# EAGLE board shieldVer2 (EAGLE 8.7.1)
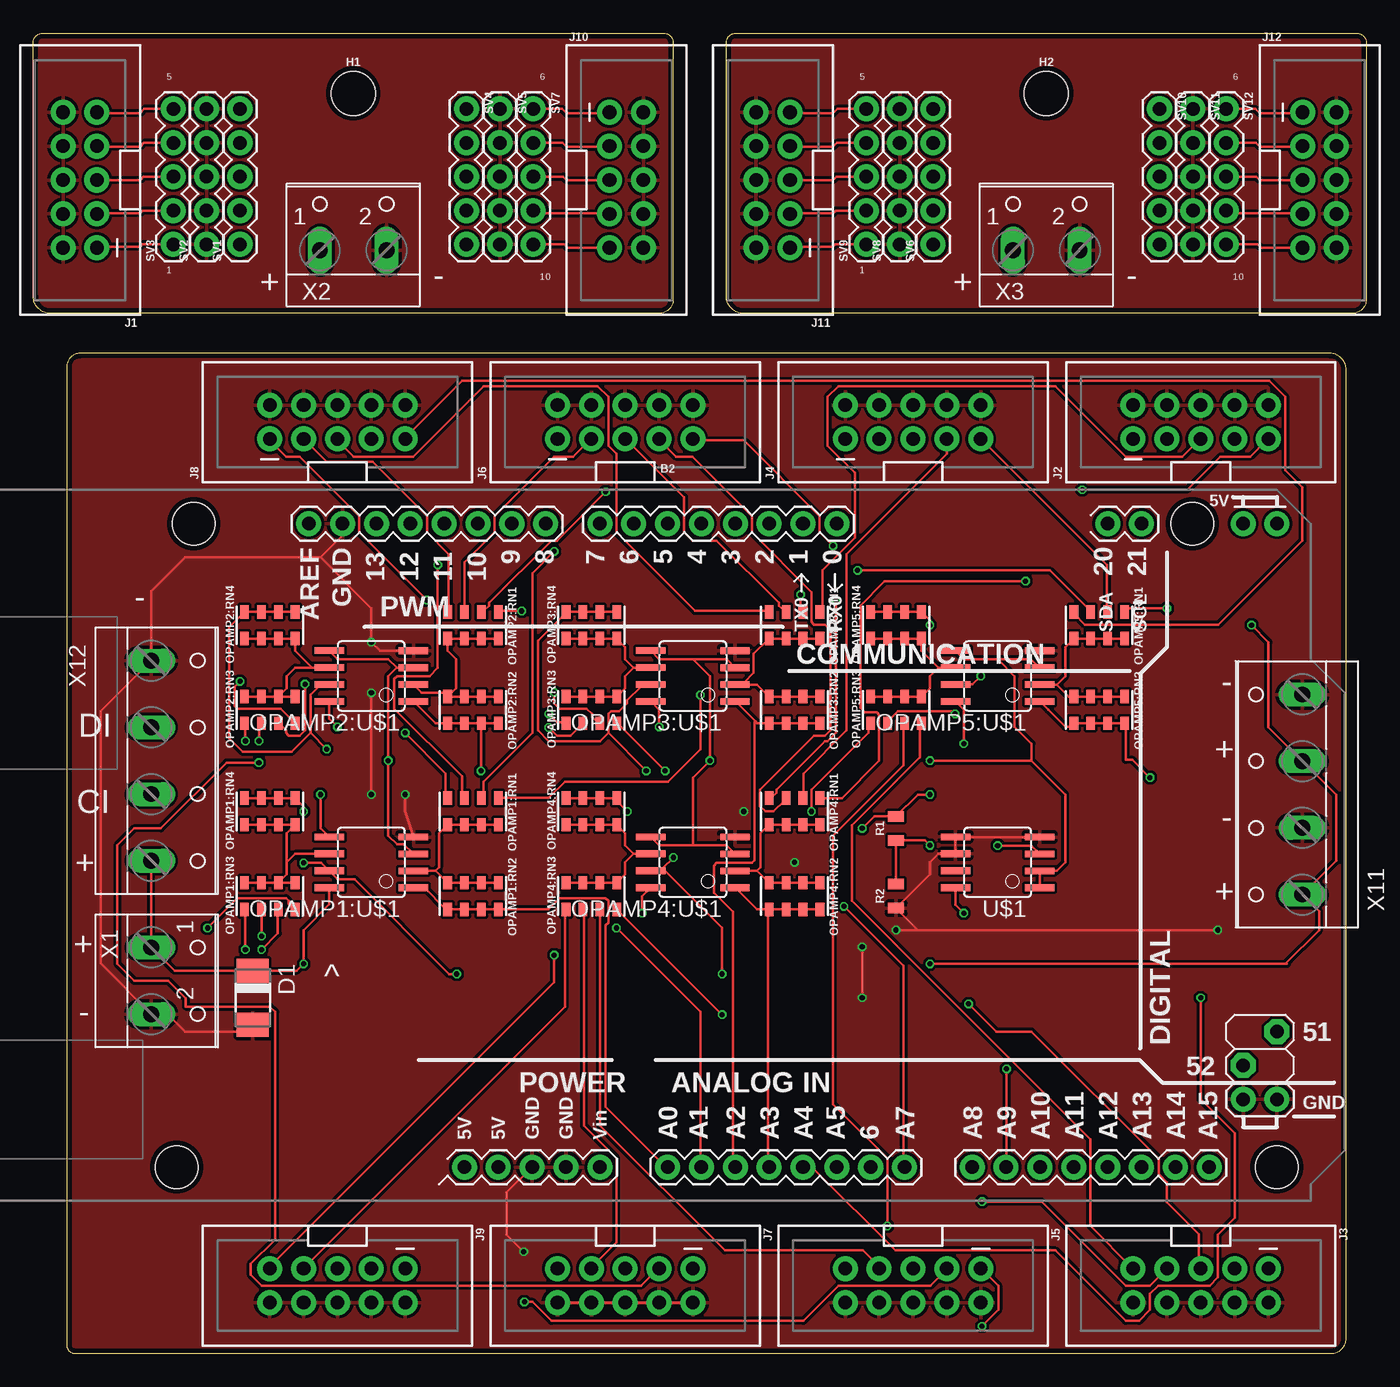
[diagram p0: board, top side]
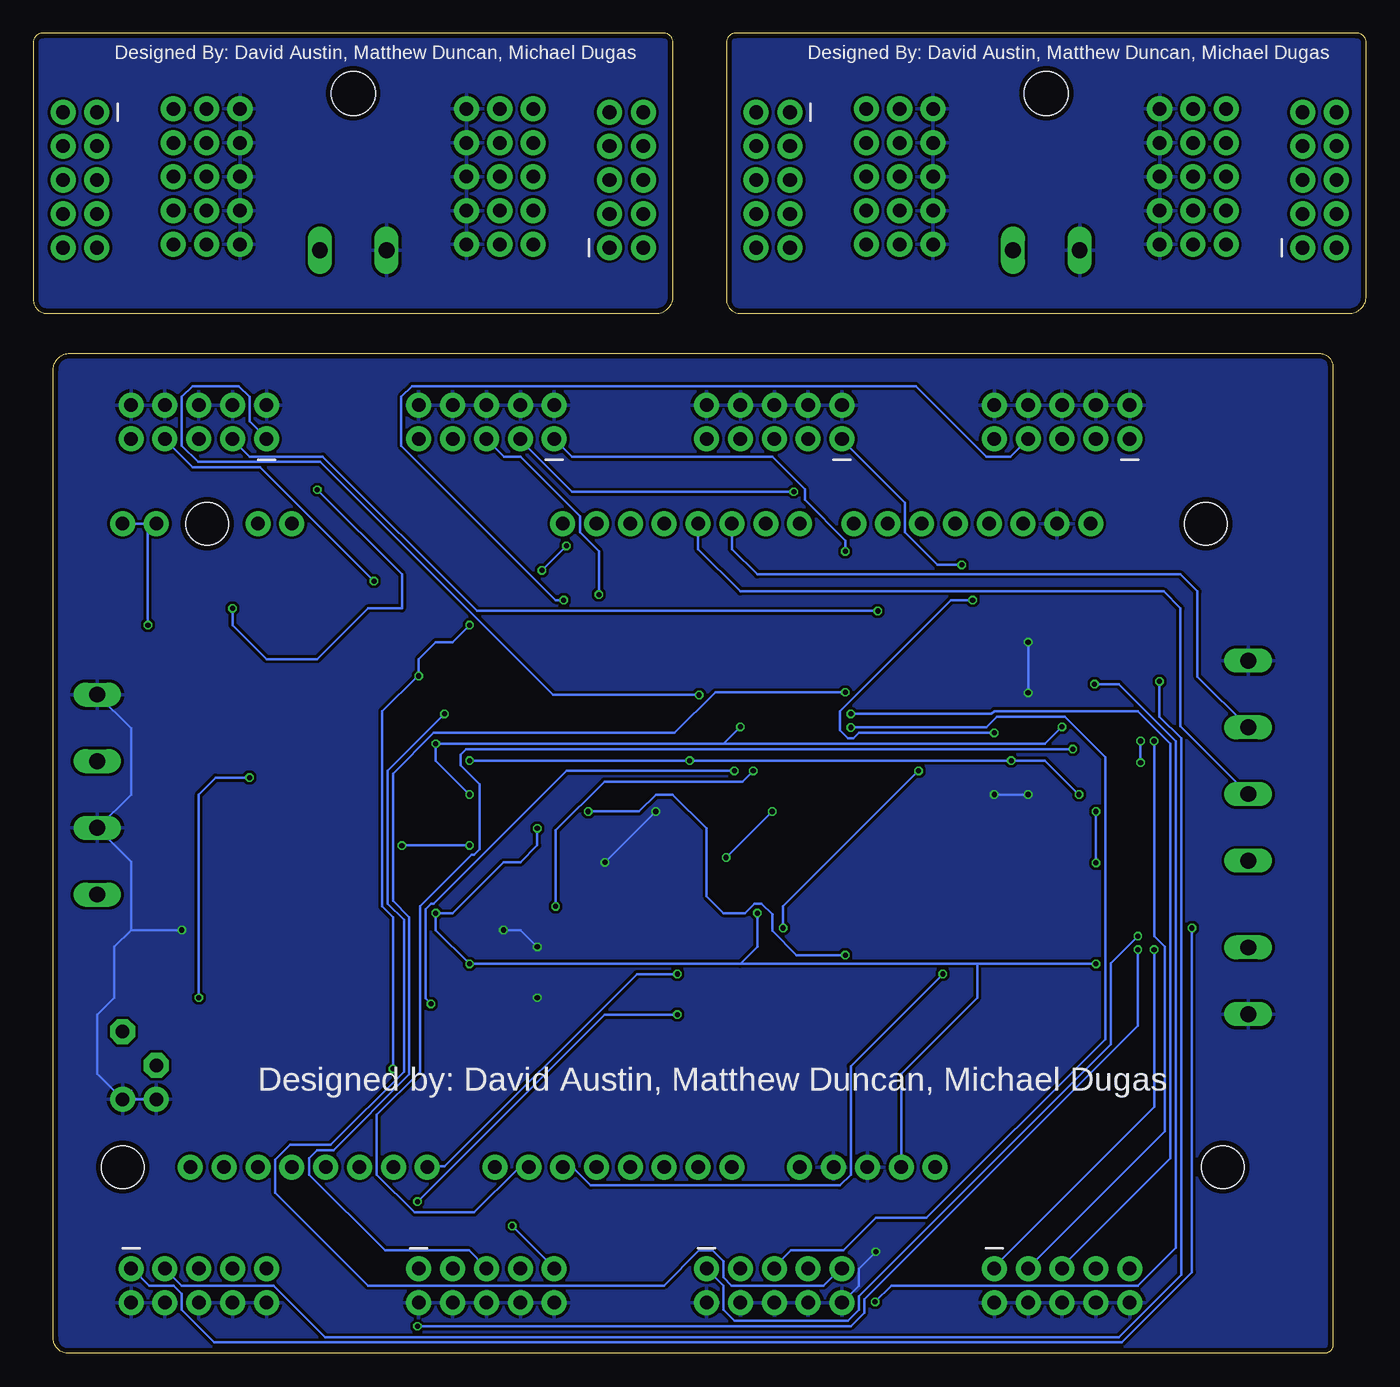
[diagram p1: board, bottom side, seen from below]

Size 100 x 99 mm. Coordinates in mm from the lower left corner, seen from the top.
Outline: 2.5,74 2.5,0.64 arc90 3.13,0 97.37,0 arc90 98.5,1.13 98.5,73.78 arc90 97.28,75 3.5,75 arc90 2.5,74
Outline: 0.68,99 47.32,99 arc-90 48,98.32 48,79.01 arc-90 46.99,78 1.27,78 arc-90 0,79.27 0,98.32 arc-90 0.68,99
Outline: 52.68,99 99.32,99 arc-90 100,98.32 100,79.01 arc-90 98.99,78 53.27,78 arc-90 52,79.27 52,98.32 arc-90 52.68,99
Copper layers (1*16): Top 0.035559375mm / dielectric 1.6mm / Bottom 0.035559375mm
Design rules "oshpark-2layer": minimum track width 6mil, minimum drill 10mil, track to track 6mil, track to pad 6mil, pad to pad 6mil, via to via 6mil, smd to smd 6mil, copper to edge 15mil, drill to drill 6mil, minimum pad ring 5mil, minimum via ring 5mil, stop-mask expansion 2.5mil, vias tented up to drill 0mil, thermal gap 10mil
Net classes: 0 default: width 0.203 mm, drill 0.381 mm, clearance 0.203 mm

## Footprints (pad centres in the part's own frame; a part is rotated, then mirrored left to right if it is on the bottom)
ARDUINO_MEGA_EDIT = drill 1.016 pad 1.88: 0 13.97,24.13; 1 11.43,24.13; 2 8.89,24.13; 3 6.35,24.13; 3.3V -13.97,-24.13; 4 3.81,24.13; 5 1.27,24.13; 5V@0 -11.43,-24.13; 5V@1 44.45,24.13; 5V@2 46.99,24.13; 6 -1.27,24.13; 7 -3.81,24.13; 8 -7.874,24.13; 9 -10.414,24.13; 10 -12.954,24.13; 11 -15.494,24.13; 12 -18.034,24.13; 13 -20.574,24.13; 20 34.29,24.13; 21 36.83,24.13; A0 1.27,-24.13; A1 3.81,-24.13; A2 6.35,-24.13; A3 8.89,-24.13; A4 11.43,-24.13; A5 13.97,-24.13; A6 16.51,-24.13; A7 19.05,-24.13; A8 24.13,-24.13; A9 26.67,-24.13; A10 29.21,-24.13; A11 31.75,-24.13; A12 34.29,-24.13; A13 36.83,-24.13; A14 39.37,-24.13; A15 41.91,-24.13; AREF -25.654,24.13; GND@0 -8.89,-24.13; GND@1 -6.35,-24.13; GND@2 44.45,-19.05; GND@3 46.99,-19.05; GND@4 -23.114,24.13; VIN -3.81,-24.13 | drill 1.016 pad 1.88 octagon: 51 46.99,-13.97; 52 44.45,-16.51 | hole 3.2: -34.29,24.13; -35.56,-24.13; 40.64,24.13; 46.99,-24.13
DO-214AC = smd 1.8 x 2.4: A 2.025,0; C -2.025,0
STAND-OFF = hole 3.302: 0,0
2X5-SHROUDED = drill 1.016 pad 1.88: 1 -1.27,5.08; 2 1.27,5.08; 3 -1.27,2.54; 4 1.27,2.54; 5 -1.27,0; 6 1.27,0; 7 -1.27,-2.54; 8 1.27,-2.54; 9 -1.27,-5.08; 10 1.27,-5.08
0805-ARV_EDIT10K = smd 0.65 x 1: 1 -1.905,-1; 2 -0.635,-1; 3 0.635,-1; 4 1.905,-1; 5 1.905,1; 6 0.635,1; 7 -0.635,1; 8 -1.905,1
SOIC8 = smd 0.5 x 2.2: 1 -1.905,-3.154; 2 -0.645,-3.154; 3 0.625,-3.154; 4 1.895,-3.154; 5 1.905,3.154; 6 0.635,3.154; 7 -0.635,3.154; 8 -1.905,3.154
0805 = smd 0.8 x 1.2: 1 -0.9,0; 2 0.9,0
1X05 = drill 1.016 pad 1.88: 1 0,0; 2 2.54,0; 3 5.08,0; 4 7.62,0; 5 10.16,0
W237-102 = drill 1.194 long: 1 -2.5,-1.27; 2 2.5,-1.27
W237-4 = drill 1.194 long: 1 -7.5,-1.27; 2 -2.5,-1.27; 3 2.5,-1.27; 4 7.5,-1.27

## Placement (x,y rotation side)
B2  ARDUINO_MEGA_R3_EDITARDUINO_MEGA_EDIT  [ARDUINO_MEGA_EDIT]  46.31,38.1 0 top
D1  [DO-214AC]  16.47,26.67 270 top
H1  STAND-OFF  [STAND-OFF]  24,94.5 0 top
H2  STAND-OFF  [STAND-OFF]  76,94.5 0 top
J1  AVR_SPI_PROG_5X2_NEWPTH2  [2X5-SHROUDED]  3.5,88 180 top
J2  AVR_SPI_PROG_5X2_NEWPTH2  [2X5-SHROUDED]  87.59,69.85 90 top
J3  AVR_SPI_PROG_5X2_NEWPTH2  [2X5-SHROUDED]  87.59,5.08 270 top
J4  AVR_SPI_PROG_5X2_NEWPTH2  [2X5-SHROUDED]  66,69.85 90 top
J5  AVR_SPI_PROG_5X2_NEWPTH2  [2X5-SHROUDED]  66,5.08 270 top
J6  AVR_SPI_PROG_5X2_NEWPTH2  [2X5-SHROUDED]  44.41,69.85 90 top
J7  AVR_SPI_PROG_5X2_NEWPTH2  [2X5-SHROUDED]  44.41,5.08 270 top
J8  AVR_SPI_PROG_5X2_NEWPTH2  [2X5-SHROUDED]  22.82,69.85 90 top
J9  AVR_SPI_PROG_5X2_NEWPTH2  [2X5-SHROUDED]  22.82,5.08 270 top
J10  AVR_SPI_PROG_5X2_NEWPTH2  [2X5-SHROUDED]  44.5,88 0 top
J11  AVR_SPI_PROG_5X2_NEWPTH2  [2X5-SHROUDED]  55.5,88 180 top
J12  AVR_SPI_PROG_5X2_NEWPTH2  [2X5-SHROUDED]  96.5,88 0 top
OPAMP1:RN1  10k  [0805-ARV_EDIT10K]  32.98,40.64 180 top
OPAMP1:RN2  10k  [0805-ARV_EDIT10K]  32.98,34.29 180 top
OPAMP1:RN3  10k  [0805-ARV_EDIT10K]  17.74,34.29 0 top
OPAMP1:RN4  10k  [0805-ARV_EDIT10K]  17.74,40.64 0 top
OPAMP1:U$1  MCP6002SMT  [SOIC8]  25.36,36.83 90 top
OPAMP2:RN1  10k  [0805-ARV_EDIT10K]  32.98,54.61 180 top
OPAMP2:RN2  10k  [0805-ARV_EDIT10K]  32.98,48.26 180 top
OPAMP2:RN3  10k  [0805-ARV_EDIT10K]  17.74,48.26 0 top
OPAMP2:RN4  10k  [0805-ARV_EDIT10K]  17.74,54.61 0 top
OPAMP2:U$1  MCP6002SMT  [SOIC8]  25.36,50.8 90 top
OPAMP3:RN1  10k  [0805-ARV_EDIT10K]  57.11,54.61 180 top
OPAMP3:RN2  10k  [0805-ARV_EDIT10K]  57.11,48.26 180 top
OPAMP3:RN3  10k  [0805-ARV_EDIT10K]  41.87,48.26 0 top
OPAMP3:RN4  10k  [0805-ARV_EDIT10K]  41.87,54.61 0 top
OPAMP3:U$1  MCP6002SMT  [SOIC8]  49.49,50.8 90 top
OPAMP4:RN1  10k  [0805-ARV_EDIT10K]  57.11,40.64 180 top
OPAMP4:RN2  10k  [0805-ARV_EDIT10K]  57.11,34.29 180 top
OPAMP4:RN3  10k  [0805-ARV_EDIT10K]  41.87,34.29 0 top
OPAMP4:RN4  10k  [0805-ARV_EDIT10K]  41.87,40.64 0 top
OPAMP4:U$1  MCP6002SMT  [SOIC8]  49.49,36.83 90 top
OPAMP5:RN1  10k  [0805-ARV_EDIT10K]  79.97,54.61 180 top
OPAMP5:RN2  10k  [0805-ARV_EDIT10K]  79.97,48.26 180 top
OPAMP5:RN3  10k  [0805-ARV_EDIT10K]  64.73,48.26 0 top
OPAMP5:RN4  10k  [0805-ARV_EDIT10K]  64.73,54.61 0 top
OPAMP5:U$1  MCP6002SMT  [SOIC8]  72.35,50.8 90 top
R1  1k  [0805]  64.73,39.37 90 top
R2  1k  [0805]  64.73,34.29 90 top
SV1  [1X05]  15.5,83.17 90 top
SV2  [1X05]  13,83.17 90 top
SV3  [1X05]  10.5,83.17 90 top
SV4  [1X05]  32.5,93.33 270 top
SV5  [1X05]  35,93.33 270 top
SV6  [1X05]  67.5,83.17 90 top
SV7  [1X05]  37.5,93.33 270 top
SV8  [1X05]  65,83.17 90 top
SV9  [1X05]  62.5,83.17 90 top
SV10  [1X05]  84.5,93.33 270 top
SV11  [1X05]  87,93.33 270 top
SV12  [1X05]  89.5,93.33 270 top
U$1  MCP6002SMT  [SOIC8]  72.35,36.83 90 top
X1  [W237-102]  10.12,27.94 270 top
X2  [W237-102]  24,84 0 top
X3  [W237-102]  76,84 0 top
X11  [W237-4]  93.94,41.91 90 top
X12  [W237-4]  10.12,44.45 270 top

## Library data of the parts
B2 = SparkFun-Boards
D1 = diode
H1 H2 = SparkFun-Hardware
J1-J12 = SparkFun-Connectors; PROD_ID: CONN-08671; SF_ID: PRT-08506
OPAMP1:RN1-OPAMP1:RN4 OPAMP2:RN1-OPAMP2:RN4 OPAMP3:RN1-OPAMP3:RN4 OPAMP4:RN1-OPAMP4:RN4 OPAMP5:RN1-OPAMP5:RN4 R1 R2 = SparkFun-Resistors
OPAMP1:U$1 OPAMP2:U$1 OPAMP3:U$1 OPAMP4:U$1 OPAMP5:U$1 U$1 = adam - ics
SV1-SV12 = SparkFun-Connectors
X1 = con-wago-500; MPN: 237-102; OC_FARNELL: unknown; OC_NEWARK: 70K9898
X2 X3 = ECE388; MPN: 237-102; OC_FARNELL: unknown; OC_NEWARK: 70K9898
X11 X12 = con-wago-500; OC_FARNELL: unknown; OC_NEWARK: unknown

## Nets
+5V: B2.5V@0 B2.5V@1 B2.5V@2 D1.C OPAMP1:U$1.8 OPAMP2:U$1.8 OPAMP3:U$1.8 OPAMP4:U$1.8 OPAMP5:U$1.8 R1.2 U$1.8 X1.1 X11.1 X11.3 X12.4
A1O: B2.A0 OPAMP1:RN2.5 OPAMP1:RN2.6 OPAMP1:RN2.7 OPAMP1:RN2.8 OPAMP1:U$1.1
A2O: B2.A1 OPAMP2:RN2.5 OPAMP2:RN2.6 OPAMP2:RN2.7 OPAMP2:RN2.8 OPAMP2:U$1.1
A3O: B2.A2 OPAMP3:RN2.5 OPAMP3:RN2.6 OPAMP3:RN2.7 OPAMP3:RN2.8 OPAMP3:U$1.1
A4O: B2.A3 OPAMP4:RN2.5 OPAMP4:RN2.6 OPAMP4:RN2.7 OPAMP4:RN2.8 OPAMP4:U$1.1
A5O: B2.A4 OPAMP5:RN2.5 OPAMP5:RN2.6 OPAMP5:RN2.7 OPAMP5:RN2.8 OPAMP5:U$1.1
A6O: B2.A5 OPAMP1:RN4.5 OPAMP1:RN4.6 OPAMP1:RN4.7 OPAMP1:RN4.8 OPAMP1:U$1.7
A7O: B2.A6 OPAMP2:RN4.5 OPAMP2:RN4.6 OPAMP2:RN4.7 OPAMP2:RN4.8 OPAMP2:U$1.7
A8O: B2.A7 OPAMP3:RN4.5 OPAMP3:RN4.6 OPAMP3:RN4.7 OPAMP3:RN4.8 OPAMP3:U$1.7
A9O: B2.A8 OPAMP4:RN4.5 OPAMP4:RN4.6 OPAMP4:RN4.7 OPAMP4:RN4.8 OPAMP4:U$1.7
A10O: B2.A9 OPAMP5:RN4.5 OPAMP5:RN4.6 OPAMP5:RN4.7 OPAMP5:RN4.8 OPAMP5:U$1.7
CI: B2.4 X12.3
DI: B2.5 X12.2
GND: B2.GND@0 B2.GND@1 B2.GND@2 B2.GND@3 B2.GND@4 D1.A J2.2 J2.4 J2.6 J2.8 J2.10 J3.2 J3.4 J3.6 J3.8 J3.10 J4.2 J4.4 J4.6 J4.8 J4.10 J5.2 J5.4 J5.6 J5.8 J5.10 J6.2 J6.4 J6.6 J6.8 J6.10 J7.2 J7.4 J7.6 J7.8 J7.10 J8.2 J8.4 J8.6 J8.8 J8.10 J9.2 J9.4 J9.6 J9.8 J9.10 OPAMP1:U$1.4 OPAMP2:U$1.4 OPAMP3:U$1.4 OPAMP4:U$1.4 OPAMP5:U$1.4 R2.1 U$1.4 U$1.5 U$1.6 X1.2 X11.2 X11.4 X12.1
GND1: J1.2 J1.4 J1.6 J1.8 J1.10 J10.2 J10.4 J10.6 J10.8 J10.10 SV2.1 SV2.2 SV2.3 SV2.4 SV2.5 SV5.1 SV5.2 SV5.3 SV5.4 SV5.5 X2.2
GND2: J11.2 J11.4 J11.6 J11.8 J11.10 J12.2 J12.4 J12.6 J12.8 J12.10 SV8.1 SV8.2 SV8.3 SV8.4 SV8.5 SV11.1 SV11.2 SV11.3 SV11.4 SV11.5 X3.2
N$1: U$1.7
N$2: R1.1 R2.2 U$1.3
OPAMP1:N$1: OPAMP1:RN3.5 OPAMP1:RN3.6 OPAMP1:RN3.7 OPAMP1:RN3.8 OPAMP1:RN4.1 OPAMP1:RN4.2 OPAMP1:RN4.3 OPAMP1:RN4.4 OPAMP1:U$1.6
OPAMP1:N$2: OPAMP1:RN1.5 OPAMP1:RN1.6 OPAMP1:RN1.7 OPAMP1:RN1.8 OPAMP1:RN2.1 OPAMP1:RN2.2 OPAMP1:RN2.3 OPAMP1:RN2.4 OPAMP1:U$1.2
OPAMP2:N$1: OPAMP2:RN3.5 OPAMP2:RN3.6 OPAMP2:RN3.7 OPAMP2:RN3.8 OPAMP2:RN4.1 OPAMP2:RN4.2 OPAMP2:RN4.3 OPAMP2:RN4.4 OPAMP2:U$1.6
OPAMP2:N$2: OPAMP2:RN1.5 OPAMP2:RN1.6 OPAMP2:RN1.7 OPAMP2:RN1.8 OPAMP2:RN2.1 OPAMP2:RN2.2 OPAMP2:RN2.3 OPAMP2:RN2.4 OPAMP2:U$1.2
OPAMP3:N$1: OPAMP3:RN3.5 OPAMP3:RN3.6 OPAMP3:RN3.7 OPAMP3:RN3.8 OPAMP3:RN4.1 OPAMP3:RN4.2 OPAMP3:RN4.3 OPAMP3:RN4.4 OPAMP3:U$1.6
OPAMP3:N$2: OPAMP3:RN1.5 OPAMP3:RN1.6 OPAMP3:RN1.7 OPAMP3:RN1.8 OPAMP3:RN2.1 OPAMP3:RN2.2 OPAMP3:RN2.3 OPAMP3:RN2.4 OPAMP3:U$1.2
OPAMP4:N$1: OPAMP4:RN3.5 OPAMP4:RN3.6 OPAMP4:RN3.7 OPAMP4:RN3.8 OPAMP4:RN4.1 OPAMP4:RN4.2 OPAMP4:RN4.3 OPAMP4:RN4.4 OPAMP4:U$1.6
OPAMP4:N$2: OPAMP4:RN1.5 OPAMP4:RN1.6 OPAMP4:RN1.7 OPAMP4:RN1.8 OPAMP4:RN2.1 OPAMP4:RN2.2 OPAMP4:RN2.3 OPAMP4:RN2.4 OPAMP4:U$1.2
OPAMP5:N$1: OPAMP5:RN3.5 OPAMP5:RN3.6 OPAMP5:RN3.7 OPAMP5:RN3.8 OPAMP5:RN4.1 OPAMP5:RN4.2 OPAMP5:RN4.3 OPAMP5:RN4.4 OPAMP5:U$1.6
OPAMP5:N$2: OPAMP5:RN1.5 OPAMP5:RN1.6 OPAMP5:RN1.7 OPAMP5:RN1.8 OPAMP5:RN2.1 OPAMP5:RN2.2 OPAMP5:RN2.3 OPAMP5:RN2.4 OPAMP5:U$1.2
S1: J1.1 SV3.1
S1A: J2.1 OPAMP1:RN1.1
S1B: J3.1 OPAMP1:RN3.4
S2: J1.3 SV3.2
S2A: J2.3 OPAMP2:RN1.1
S2B: J3.3 OPAMP2:RN3.4
S3: J1.5 SV3.3
S3A: J2.5 OPAMP3:RN1.1
S3B: J3.5 OPAMP3:RN3.4
S4: J1.7 SV3.4
S4A: J2.7 OPAMP4:RN1.1
S4B: J3.7 OPAMP4:RN3.4
S5: J1.9 SV3.5
S5A: J2.9 OPAMP5:RN1.1
S5B: J3.9 OPAMP5:RN3.4
S6: J10.1 SV7.1
S6A: J4.1 OPAMP1:RN1.2
S6B: J5.1 OPAMP1:RN3.3
S7: J10.3 SV7.2
S7A: J4.3 OPAMP2:RN1.2
S7B: J5.3 OPAMP2:RN3.3
S8: J10.5 SV7.3
S8A: J4.5 OPAMP3:RN1.2
S8B: J5.5 OPAMP3:RN3.3
S9: J10.7 SV7.4
S9A: J4.7 OPAMP4:RN1.2
S9B: J5.7 OPAMP4:RN3.3
S10: J10.9 SV7.5
S10A: J4.9 OPAMP5:RN1.2
S10B: J5.9 OPAMP5:RN3.3
S11: J11.1 SV9.1
S11A: J6.1 OPAMP1:RN1.3
S11B: J7.1 OPAMP1:RN3.2
S12: J11.3 SV9.2
S12A: J6.3 OPAMP2:RN1.3
S12B: J7.3 OPAMP2:RN3.2
S13: J11.5 SV9.3
S13A: J6.5 OPAMP3:RN1.3
S13B: J7.5 OPAMP3:RN3.2
S14: J11.7 SV9.4
S14A: J6.7 OPAMP4:RN1.3
S14B: J7.7 OPAMP4:RN3.2
S15: J11.9 SV9.5
S15A: J6.9 OPAMP5:RN1.3
S15B: J7.9 OPAMP5:RN3.2
S16: J12.1 SV12.1
S16A: J8.1 OPAMP1:RN1.4
S16B: J9.1 OPAMP1:RN3.1
S17: J12.3 SV12.2
S17A: J8.3 OPAMP2:RN1.4
S17B: J9.3 OPAMP2:RN3.1
S18: J12.5 SV12.3
S18A: J8.5 OPAMP3:RN1.4
S18B: J9.5 OPAMP3:RN3.1
S19: J12.7 SV12.4
S19A: J8.7 OPAMP4:RN1.4
S19B: J9.7 OPAMP4:RN3.1
S20: J12.9 SV12.5
S20A: J8.9 OPAMP5:RN1.4
S20B: J9.9 OPAMP5:RN3.1
VCC: SV1.1 SV1.2 SV1.3 SV1.4 SV1.5 SV4.1 SV4.2 SV4.3 SV4.4 SV4.5 X2.1
VCC1: SV6.1 SV6.2 SV6.3 SV6.4 SV6.5 SV10.1 SV10.2 SV10.3 SV10.4 SV10.5 X3.1
VREF: OPAMP1:U$1.3 OPAMP1:U$1.5 OPAMP2:U$1.3 OPAMP2:U$1.5 OPAMP3:U$1.3 OPAMP3:U$1.5 OPAMP4:U$1.3 OPAMP4:U$1.5 OPAMP5:U$1.3 OPAMP5:U$1.5 U$1.1 U$1.2

## Tracks (layer width: path | path; a pad name or v marks a point on that pad's centre or on a via)
+5V  (via drill 0.38)
  Top 0.203: X12.4 X1.1 10.6,28.7 D1.C 19.77,28.7 v20.28,29.21 20.28,31.75 22.21,33.68 OPAMP1:U$1.8 | v69.81,33.02 69.2,33.63 U$1.8 | v62.19,39.37 63.09,40.27 R1.2 66.37,41.91 v67.27,41.91 | OPAMP2:U$1.8 22.21,47.6 v22.82,46.99 | v69.81,45.72 69.81,48.28 OPAMP5:U$1.8 | OPAMP3:U$1.8 46.95,48.28 v46.95,46.99 | v45.68,33.02 45.68,34.27 OPAMP4:U$1.8 | v67.27,29.21 93.94,29.21 | 93.94,29.21 94.06,29.21 | 93.94,29.21 96.48,31.75 96.48,33.14 X11.1 97.75,36.95 97.75,41.91 95.25,44.41 X11.3 92.67,46.95 92.67,53.34 v91.4,54.61
  Bottom 0.203: v20.28,29.21 29.17,29.21 | 29.17,29.21 46.95,29.21 | 46.95,29.21 v67.27,29.21 69.81,31.75 v69.81,33.02 68.54,33.02 64.73,36.83 63.46,36.83 62.19,38.1 v62.19,39.37 | v67.27,41.91 69.81,44.45 v69.81,45.72 48.22,45.72 | 48.22,45.72 24.09,45.72 v22.82,46.99 | v46.95,46.99 48.22,45.72 | 46.95,29.21 45.68,30.48 v45.68,33.02 | B2.5V@0 34.88,20.95 29.17,26.67 29.17,29.21 | v91.4,54.61 91.4,61.59 B2.5V@1 B2.5V@2
A1O
  Top 0.203: B2.A0 47.41,14.02 42.94,18.49 42.94,32.11 43.14,32.31 43.14,33.93 42.94,34.14 39.48,34.14 38.67,33.33 35.01,33.33 OPAMP1:RN2.8 OPAMP1:RN2.7 OPAMP1:RN2.6 OPAMP1:RN2.5 30.95,33.33 29.35,34.92 OPAMP1:U$1.1
A2O  (via drill 0.38)
  Top 0.203: OPAMP2:RN2.7 OPAMP2:RN2.6 OPAMP2:RN2.5 30.17,47.26 28.54,48.9 OPAMP2:U$1.1 | OPAMP2:RN2.7 OPAMP2:RN2.8 | v43.75,31.9 50.05,25.6 50.05,14.02 B2.A1 | v33.59,43.69 33.59,47.14 OPAMP2:RN2.7
  Bottom 0.203: v43.75,31.9 43.75,33.53 v33.59,43.69
A3O
  Top 0.203: OPAMP3:RN2.8 OPAMP3:RN2.7 OPAMP3:RN2.6 OPAMP3:RN2.5 54.3,47.26 54.16,47.4 | OPAMP3:U$1.1 52.66,48.9 54.16,47.4 | B2.A2 52.49,14.02 52.49,33.12 51.06,34.54 51.06,36.58 51.27,36.78 53.91,36.78 54.11,36.98 54.11,47.35 54.16,47.4
A4O
  Top 0.203: OPAMP4:RN2.8 OPAMP4:RN2.7 OPAMP4:RN2.6 OPAMP4:RN2.5 | OPAMP4:RN2.5 54.3,33.29 52.66,34.92 OPAMP4:U$1.1 | B2.A3 55.13,14.02 55.13,33.12 OPAMP4:RN2.5
A5O  (via drill 0.38)
  Top 0.203: OPAMP5:U$1.1 76.14,48.26 76.16,48.26 77.43,46.99 77.8,46.99 OPAMP5:RN2.5 OPAMP5:RN2.6 OPAMP5:RN2.7 OPAMP5:RN2.8 81.95,47.14 81.95,44.5 82.46,44.5 v83.78,43.18 | B2.A4 57.77,13.82 58.58,13.82 64.68,7.72 76.67,7.72 81.95,2.44 82.97,2.44 83.78,3.25 83.78,4.47 84.39,5.08 88.25,5.08 88.86,5.69 88.86,8.89 90.13,10.16 90.13,16.51 87.59,19.05 v87.59,26.67
  Bottom 0.203: v87.59,26.67 87.59,41.91 86.32,43.18 v83.78,43.18
A6O  (via drill 0.38)
  Top 0.203: OPAMP1:RN4.8 OPAMP1:RN4.7 OPAMP1:RN4.6 OPAMP1:RN4.5 20.28,41.01 v20.28,40.64 | v31.76,28.45 31.2,28.45 24.09,35.56 22.84,35.56 OPAMP1:U$1.7 21.61,36.79 v20.28,36.79
  Bottom 0.203: v31.76,28.45 38.67,21.54 38.67,13.41 39.48,12.6 58.18,12.6 59.4,13.82 60.21,13.82 B2.A5 | v20.28,36.79 v20.28,40.64
A7O  (via drill 0.38)
  Top 0.203: OPAMP2:RN4.5 OPAMP2:RN4.6 OPAMP2:RN4.7 OPAMP2:RN4.8 15.71,55.47 14.69,54.46 14.69,46.13 15.71,45.11 19.37,45.11 20.79,46.53 | 20.79,46.53 20.79,49.38 21.4,49.99 22.01,49.99 OPAMP2:U$1.7 | 20.79,46.53 v22.01,45.31
  Bottom 0.203: v22.01,45.31 67.52,45.31 67.93,44.91 67.93,44.09 66.51,42.67 66.51,37.8 66.91,37.39 67.12,37.39 70.98,33.53 70.98,21.13 74.23,17.88 74.23,13.41 71.39,10.57 66.91,10.57 63.66,13.82 62.85,13.82 B2.A6
A8O  (via drill 0.38)
  Top 0.203: OPAMP3:RN4.5 OPAMP3:RN4.6 OPAMP3:RN4.7 OPAMP3:RN4.8 39.89,55.47 37.86,53.44 37.86,46.74 38.67,45.92 42.53,45.92 43.14,46.53 | 43.14,46.53 43.14,47.95 43.34,48.16 43.95,48.16 44.56,48.77 44.56,48.97 45.58,49.99 46.19,49.99 OPAMP3:U$1.7 | v60.82,33.53 65.29,29.06 65.29,14.02 B2.A7 | 43.14,46.53 v45.98,43.69
  Bottom 0.203: v60.82,33.53 60.82,39.22 57.16,42.88 46.8,42.88 v45.98,43.69
A9O  (via drill 0.38)
  Top 0.203: OPAMP4:RN4.8 OPAMP4:RN4.7 OPAMP4:RN4.6 OPAMP4:RN4.5 43.75,41.45 v44.56,40.64 | 47.2,36.37 46.39,36.37 OPAMP4:U$1.7 47.2,36.37 | v48.02,37.19 47.2,36.37 | v51.67,28.45 51.67,31.9 47.2,36.37
  Bottom 0.203: v44.56,40.64 v48.02,37.19 | v51.67,28.45 54.72,28.45 69.15,14.02 70.37,14.02 B2.A8
A10O  (via drill 0.38)
  Top 0.203: OPAMP5:RN4.8 OPAMP5:RN4.7 OPAMP5:RN4.6 OPAMP5:RN4.5 67.27,54.98 v67.27,54.61 | v71.08,50.8 70.44,50.16 OPAMP5:U$1.7 | v73.01,21.34 73.01,14.02 B2.A9
  Bottom 0.203: v67.27,54.61 68.54,53.34 69.81,53.34 71.08,52.07 v71.08,50.8 71.18,50.8 73.82,48.16 73.82,33.53 73.01,32.72 v73.01,21.34
CI
  Bottom 0.203: X12.3 13.93,47.03 13.93,55.88 15.2,57.15 46.95,57.15 50.12,60.33 B2.4
DI
  Bottom 0.203: X12.2 12.66,50.76 12.66,57.15 13.93,58.42 45.68,58.42 47.59,60.33 B2.5
GND  (via drill 0.38)
  Top 0.203: D1.A 15.96,24.13 11.39,24.13 10.08,25.44 X1.2 5.04,29.25 5.04,48.14 X12.1 8.85,57.15 11.39,59.69 21.55,59.69 | B2.GND@4 23.2,61.34 21.55,59.69 | U$1.4 U$1.5 U$1.6 67.91,37.47 67.27,36.83 67.27,35.93 R2.1 66.37,31.75 | B2.GND@0 35.52,12.06 35.52,8.89 v36.79,7.62 | J7.2 J7.4 J7.6 J7.8 J7.10 | v62.19,26.67 v62.19,30.48 | v64.73,31.75 66.37,31.75 | OPAMP2:U$1.4 26,52.7 v25.36,53.34 25.36,55.88 21.55,59.69 | v25.36,49.53 v25.36,41.91 | v27.9,41.91 27.9,40.61 OPAMP1:U$1.4 | 66.37,31.75 v88.86,31.75
  Bottom 0.203: B2.GND@3 B2.GND@2 | B2.GND@3 92.67,19.68 | v36.79,7.62 38.06,6.35 38.06,5.08 J7.10 | v62.19,30.48 63.46,31.75 v64.73,31.75 | v25.36,53.34 v25.36,49.53 | v25.36,41.91 v27.9,41.91 | v57.11,36.83 v53.3,40.64 | B2.GND@3 95.21,20.95 95.21,25.4 93.94,26.67 93.94,30.48 92.67,31.75 | v88.86,31.75 92.67,31.75 | 92.67,31.75 92.67,36.87 X11.2 95.17,39.41 92.67,41.91 92.67,46.87 X11.4
  pour Top: 2.5,0.5 2.5,74 arc-90 3.5,75 97.5,75 arc-90 98.5,74 98.5,1 arc-90 97.5,0 3,0 arc-90
  pour Bottom: 2.5,74 arc-90 3.5,75 97.5,75 arc-90 98.5,74 98.5,1 arc-90 97.5,0 3,0 arc-90 2.5,0.5
GND1
  pour Top: 0,99 48,99 48.26,78 0,78
GND2
  pour Top: 52,99 100,99 100.26,78 52,78
N$2  (via drill 0.38)
  Top 0.203: v67.27,38.1 66.9,38.47 R1.1 R2.2 | v72.35,38.08 74.88,38.08 U$1.3
  Bottom 0.203: v67.27,38.1 72.35,38.1 v72.35,38.08
OPAMP1:N$1
  Top 0.203: OPAMP1:RN4.1 OPAMP1:RN4.2 OPAMP1:RN4.3 OPAMP1:RN4.4 19.01,39.01 19.01,36.83 | OPAMP1:RN3.8 OPAMP1:RN3.7 OPAMP1:RN3.6 | OPAMP1:RN3.6 OPAMP1:RN3.5 | OPAMP1:RN3.6 19.01,35.92 19.01,36.83 | 19.01,36.83 19.64,37.47 OPAMP1:U$1.6
OPAMP1:N$2
  Top 0.203: OPAMP1:RN2.1 OPAMP1:RN2.2 OPAMP1:RN2.3 OPAMP1:RN2.4 30.18,36.19 | OPAMP1:RN1.8 OPAMP1:RN1.7 OPAMP1:RN1.6 OPAMP1:RN1.5 30.44,39.01 30.44,36.45 30.18,36.19 | OPAMP1:U$1.2 30.18,36.19
OPAMP2:N$1
  Top 0.203: OPAMP2:RN3.5 OPAMP2:RN3.6 | OPAMP2:RN3.6 OPAMP2:RN3.7 OPAMP2:RN3.8 | OPAMP2:RN4.1 OPAMP2:RN4.2 OPAMP2:RN4.3 OPAMP2:RN4.4 19.64,52.7 20.91,51.44 | OPAMP2:U$1.6 20.91,51.44 | OPAMP2:RN3.6 19.01,49.9 19.01,50.8 19.64,51.44 20.91,51.44
OPAMP2:N$2
  Top 0.203: OPAMP2:RN2.1 OPAMP2:RN2.2 OPAMP2:RN2.3 OPAMP2:RN2.4 | OPAMP2:RN2.4 30.8,49.53 29.14,49.53 OPAMP2:U$1.2 | OPAMP2:RN2.4 31.71,49.9 31.71,52.07 31.07,52.7 OPAMP2:RN1.5 OPAMP2:RN1.6 OPAMP2:RN1.7 OPAMP2:RN1.8
OPAMP3:N$1
  Top 0.203: OPAMP3:RN3.8 OPAMP3:RN3.7 OPAMP3:RN3.6 OPAMP3:RN3.5 44.41,49.9 44.41,50.8 45.05,51.44 | OPAMP3:RN4.1 OPAMP3:RN4.2 OPAMP3:RN4.3 OPAMP3:RN4.4 44.41,52.98 44.41,52.07 45.05,51.44 | 45.05,51.44 OPAMP3:U$1.6
OPAMP3:N$2
  Top 0.203: OPAMP3:RN1.8 OPAMP3:RN1.7 OPAMP3:RN1.6 OPAMP3:RN1.5 54.05,52.45 54.05,51.05 53.3,50.3 53.3,50.16 | OPAMP3:RN2.1 OPAMP3:RN2.2 OPAMP3:RN2.3 OPAMP3:RN2.4 54.31,50.16 53.3,50.16 | 53.3,50.16 OPAMP3:U$1.2
OPAMP4:N$1
  Top 0.203: OPAMP4:RN3.8 OPAMP4:RN3.7 OPAMP4:RN3.6 OPAMP4:RN3.5 44.41,35.92 44.41,36.83 45.05,37.47 | 45.05,37.47 OPAMP4:U$1.6 | OPAMP4:RN4.1 OPAMP4:RN4.2 OPAMP4:RN4.3 OPAMP4:RN4.4 44.41,39.01 44.41,38.1 45.05,37.47
OPAMP4:N$2
  Top 0.203: OPAMP4:RN2.1 OPAMP4:RN2.2 OPAMP4:RN2.3 OPAMP4:RN2.4 54.31,36.19 | 54.31,36.19 OPAMP4:U$1.2 | OPAMP4:RN1.8 OPAMP4:RN1.7 OPAMP4:RN1.6 OPAMP4:RN1.5 54.57,39.01 54.57,36.45 54.31,36.19
OPAMP5:N$1
  Top 0.203: OPAMP5:RN4.1 OPAMP5:RN4.2 OPAMP5:RN4.3 OPAMP5:RN4.4 66.64,52.7 67.91,51.44 | OPAMP5:RN3.8 OPAMP5:RN3.7 OPAMP5:RN3.6 OPAMP5:RN3.5 67.27,49.9 67.27,50.8 67.91,51.44 | 67.91,51.44 OPAMP5:U$1.6
OPAMP5:N$2
  Top 0.203: OPAMP5:RN2.1 OPAMP5:RN2.2 OPAMP5:RN2.3 OPAMP5:RN2.4 77.7,49.26 76.81,50.16 76.78,50.16 | 76.78,50.16 OPAMP5:U$1.2 | OPAMP5:RN1.8 OPAMP5:RN1.7 OPAMP5:RN1.6 OPAMP5:RN1.5 77.43,52.98 77.43,50.8 76.78,50.16
S1
  Top 0.203: J1.1 4.85,83 8,83 8.17,83.17 SV3.1
S1A  (via drill 0.38)
  Top 0.203: v50.05,49.38 50.05,45.31 47.61,42.88 39.89,42.88 38.67,41.66 35.01,41.66 OPAMP1:RN1.1
  Bottom 0.203: v50.05,49.38 61.02,49.38 78.5,66.85 87.64,66.85 88.86,68.07 88.86,71.73 88.05,72.54 84.59,72.54 83.78,71.73 83.78,69.9 82.56,68.68 J2.1
S1B  (via drill 0.38)
  Top 0.203: v13.07,31.9 15.3,34.14 18.96,34.14 19.16,33.93 19.16,33.73 19.57,33.33 OPAMP1:RN3.4
  Bottom 0.203: v13.07,31.9 13.07,6.1 18.35,0.81 86.42,0.81 88.86,3.25 88.86,4.47 89.47,5.08 91.3,5.08 92.52,6.3 J3.1
S2
  Top 0.203: J1.3 4.85,85.54 4.89,85.5 8,85.5 8.21,85.71 SV3.2
S2A  (via drill 0.38)
  Top 0.203: v36.64,55.68 35.01,55.68 OPAMP2:RN1.1
  Bottom 0.203: v36.64,55.68 66.71,55.68 78.29,67.26 83.78,67.26 85,68.48 J2.3
S2B  (via drill 0.38)
  Top 0.203: v15.51,50.39 15.1,49.99 15.1,48.56 15.3,48.36 18.55,48.36 19.57,47.35 OPAMP2:RN3.4
  Bottom 0.203: v15.51,50.39 15.51,47.75 13.88,46.13 13.88,5.89 18.55,1.22 78.09,1.22 81.95,5.08 88.86,5.08 J3.3
S3
  Top 0.203: 4.85,88.08 J1.5 8,88 8.25,88.25 SV3.3
S3A
  Top 0.203: OPAMP3:RN1.1 59.19,55.68 59.19,58.73 61.63,61.16 61.63,66.04 59.6,68.07 59.6,71.73 60.41,72.54 76.67,72.54 81.95,67.26 86.22,67.26 87.44,68.48 J2.5
S3B  (via drill 0.38)
  Top 0.203: v47.41,43.69 43.95,47.14 OPAMP3:RN3.4 | J3.5 87.44,6.5 87.44,8.94 85.05,11.33 85.05,12.85 84.44,13.45 84.44,14.58 74.89,24.13 72.25,24.13 v70.17,26.21
  Bottom 0.203: v47.41,43.69 60.01,43.69 69.96,33.73 70.17,33.73 70.57,33.33 70.57,26.62 v70.17,26.21
S4
  Top 0.203: J1.7 4.85,90.62 4.97,90.5 8,90.5 8.29,90.79 SV3.4
S4A  (via drill 0.38)
  Top 0.203: v74.43,57.91 63.87,57.91 62.04,56.08 62.04,48.41 62.38,48.06 63.28,48.06 63.46,47.88 63.46,44.45 60.65,41.64 OPAMP4:RN1.1 59.19,41.66
  Bottom 0.203: v74.43,57.91 82.97,66.45 88.05,66.45 90.08,68.48 J2.7
S4B  (via drill 0.38)
  Top 0.203: v51.67,25.4 43.95,33.12 OPAMP4:RN3.4 | v71.18,11.38 75.65,11.38 81.95,5.08 83.78,5.08 J3.7
  Bottom 0.203: v51.67,25.4 57.16,25.4 v71.18,11.38
S5
  Top 0.203: 9.92,93.08 SV3.5 8.33,93.33 8,93 4.85,93 J1.9
S5A  (via drill 0.38)
  Top 0.203: OPAMP5:RN1.1 81.95,55.68 82.15,55.88 v85.05,55.88 | J2.9 92.52,68.48 91.3,67.26 89.06,67.26 86.57,64.77 v78.7,64.77
  Bottom 0.203: v85.05,55.88 85.05,54.61 82.51,52.07 78.7,52.07 74.89,55.88 72.35,55.88 72.35,58.42 v78.7,64.77
S5B
  Top 0.203: J3.9 79.31,9.55 79.31,16.05 61.43,33.93 61.43,39.62 66.51,44.7 66.51,47.14 OPAMP5:RN3.4
S6
  Top 0.203: SV7.1 39.67,93.33 40,93 43.15,93 J10.1
S6A  (via drill 0.38)
  Top 0.203: v39.08,60.15 37.45,58.52 37.45,46.53 33.79,42.88 33.79,41.66 OPAMP1:RN1.2
  Bottom 0.203: v39.08,60.15 39.08,60.96 42.12,64.01 42.12,64.82 44.56,67.26 59.6,67.26 J4.1
S6B  (via drill 0.38)
  Top 0.203: v17.13,30.28 18.35,31.5 18.35,33.12 OPAMP1:RN3.3 | v71.18,2.03 72.4,3.25 72.4,5.08 71.18,6.3 J5.1
  Bottom 0.203: v17.13,30.28 17.13,24.59 37.65,4.06 37.65,3.05 38.67,2.03 v71.18,2.03
S7
  Top 0.203: SV7.2 39.71,90.79 40,90.5 43.19,90.5 J10.3
S7A  (via drill 0.38)
  Top 0.203: v42.94,64.62 39.28,60.96 38.87,60.96 34.2,56.29 34.2,56.08 33.79,55.68 OPAMP2:RN1.2
  Bottom 0.203: v42.94,64.62 59.6,64.62 63.46,68.48 J4.3
S7B  (via drill 0.38)
  Top 0.203: v20.38,50.19 20.38,46.74 19.98,46.33 19.16,46.33 18.96,46.53 18.96,46.74 18.55,47.14 OPAMP2:RN3.3 | v36.84,3.86 37.45,3.86 38.87,2.44 57.77,2.44 60.41,5.08 67.32,5.08 68.54,6.3 J5.3
  Bottom 0.203: v20.38,50.19 18.55,50.19 14.29,45.92 14.29,7.92 17.13,5.08 35.62,5.08 v36.84,3.86
S8
  Top 0.203: SV7.3 39.75,88.25 40,88 J10.5
S8A  (via drill 0.38)
  Top 0.203: v57.57,56.9 57.57,55.68 OPAMP3:RN1.2
  Bottom 0.203: v57.57,56.9 57.57,60.15 58.99,61.57 58.99,62.79 63.46,67.26 64.68,67.26 J4.5
S8B  (via drill 0.38)
  Top 0.203: v39.08,49.58 39.08,48.77 39.48,48.36 41.51,48.36 41.92,47.95 41.92,47.75 42.33,47.35 OPAMP3:RN3.3
  Bottom 0.203: v39.08,49.58 48.83,49.58 51.88,46.53 69.96,46.53 73.01,43.48 73.01,33.93 71.79,32.72 71.79,20.93 77.48,15.24 78.7,15.24 79.31,14.63 79.31,13.41 73.62,7.72 67.32,7.72 66.1,6.5 J5.5
S9
  Top 0.203: SV7.4 37.71,85.5 43.19,85.5 J10.7
S9A
  Top 0.203: J4.7 68.54,67.46 61.02,59.94 61.02,46.74 57.77,43.48 57.77,41.66 OPAMP4:RN1.2
S9B
  Top 0.203: OPAMP4:RN3.3 42.53,33.12 42.53,17.07 51.88,7.72 62.24,7.72 63.46,6.5 J5.7
S10
  Top 0.203: SV7.5 39.83,83.17 40.08,82.92 J10.9
S10A
  Top 0.203: J4.9 80.53,59.13 80.53,55.68 OPAMP5:RN1.2
S10B  (via drill 0.38)
  Top 0.203: v64.07,9.55 64.07,14.63 60.01,18.69 60.01,38.81 65.29,44.09 65.29,47.14 OPAMP5:RN3.3
  Bottom 0.203: v64.07,9.55 61.02,6.5 J5.9
S11
  Top 0.203: J11.1 56.85,83 60,83 60.17,83.17 SV9.1
S11A  (via drill 0.38)
  Top 0.203: v30.34,59.13 30.34,51.41 29.73,50.8 27.29,50.8 27.09,50.6 27.09,48.36 32.17,43.28 32.17,41.66 OPAMP1:RN1.3
  Bottom 0.203: v30.34,59.13 32.17,59.13 34.61,61.57 34.61,63.8 39.28,68.48 J6.1
S11B  (via drill 0.38)
  Top 0.203: v17.13,31.29 17.13,33.12 OPAMP1:RN3.2
  Bottom 0.203: v17.13,31.29 19.16,29.26 19.16,23.16 38.06,4.27 38.06,3.25 38.87,2.44 47.41,2.44 48.22,3.25 48.22,5.08 J7.1
S12
  Top 0.203: J11.3 56.85,85.54 56.89,85.5 60,85.5 60.21,85.71 SV9.2
S12A
  Top 0.203: OPAMP2:RN1.3 32.37,55.68 32.37,59.33 34.61,61.57 34.61,62.79 39.08,67.26 40.5,67.26 41.72,68.48 J6.3
S12B  (via drill 0.38)
  Top 0.203: v16.93,45.92 16.93,47.14 OPAMP2:RN3.2 | v16.93,44.3 14.49,44.3 9.56,39.37 7.58,39.37 6.31,38.1 6.31,29.21 7.58,27.94 10.12,27.94 11.44,26.62 11.44,26.01 17.74,26.01 18.15,25.6 18.15,8.53 16.32,6.71 16.32,5.89 17.13,5.08 45.58,5.08 46.8,6.3 J7.3
  Bottom 0.203: v16.93,44.3 v16.93,45.92
S13
  Top 0.203: 56.85,88.08 J11.5 60,88 60.25,88.25 SV9.3
S13A
  Top 0.203: OPAMP3:RN1.3 56.35,55.68 55.94,56.08 55.94,56.29 51.27,60.96 49.44,60.96 48.83,61.57 48.83,64.21 44.56,68.48 J6.5
S13B  (via drill 0.38)
  Top 0.203: v38.67,46.94 39.28,46.33 40.3,46.33 41.11,47.14 OPAMP3:RN3.2
  Bottom 0.203: v38.67,46.94 28.51,46.94 27.7,47.75 22.62,47.75 19.57,44.7 19.57,23.57 32.98,10.16 36.79,10.16 39.23,7.72 43.14,7.72 44.36,6.5 J7.5
S14
  Top 0.203: J11.7 56.85,90.62 56.97,90.5 60,90.5 60.29,90.79 SV9.4
S14A
  Top 0.203: OPAMP4:RN1.3 56.35,41.45 55.53,40.64 54.93,40.64 54.52,41.05 54.52,42.27 58.58,46.33 59.4,46.33 59.8,46.74 59.8,54.25 59.4,54.66 58.58,54.66 58.38,54.86 58.38,57.1 53.91,61.57 53.91,62.79 49.44,67.26 48.22,67.26 47,68.48 J6.7
S14B
  Top 0.203: OPAMP4:RN3.2 41.31,33.12 41.31,17.07 43.75,14.63 43.75,8.33 41.92,6.5 J7.7
S15
  Top 0.203: 61.92,93.08 SV9.5 60.33,93.33 60,93 56.85,93 J11.9
S15A  (via drill 0.38)
  Top 0.203: v61.83,58.73 76.26,58.73 79.31,55.68 OPAMP5:RN1.3 | v60.01,60.55 58.99,61.57 58.99,62.79 53.3,68.48 49.64,68.48 J6.9
  Bottom 0.203: v60.01,60.55 v61.83,58.73
S15B  (via drill 0.38)
  Top 0.203: v69.15,47.95 68.95,48.16 64.88,48.16 64.09,47.37 OPAMP5:RN3.2
  Bottom 0.203: v69.15,47.95 73.42,43.69 73.42,33.73 72.2,32.51 72.2,21.13 77.68,15.65 80.73,15.65 81.85,14.53 81.85,12.04 74.89,5.08 52.69,5.08 50.05,7.72 49.03,7.72 48.22,6.91 48.22,5.69 47.61,5.08 40.7,5.08 39.48,6.3 J7.9
S16
  Top 0.203: SV12.1 91.67,93.33 92,93 95.15,93 J12.1
S16A  (via drill 0.38)
  Top 0.203: v27.9,46.53 30.95,43.48 30.95,41.66 OPAMP1:RN1.4 | v29.53,56.49 24.45,61.57 24.45,62.79 19.98,67.26 18.96,67.26 17.74,68.48 J8.1
  Bottom 0.203: v27.9,46.53 38.06,46.53 38.47,46.13 38.87,46.13 39.48,46.74 39.48,48.16 31.15,56.49 v29.53,56.49
S16B  (via drill 0.38)
  Top 0.203: v15.91,30.28 15.91,33.12 OPAMP1:RN3.1
  Bottom 0.203: v15.91,30.28 15.91,18.49 27.9,6.5 J9.1
S17
  Top 0.203: SV12.2 91.71,90.79 92,90.5 95.19,90.5 J12.3
S17A
  Top 0.203: J8.3 22.01,66.85 25.46,66.85 29.53,62.79 29.53,61.57 31.15,59.94 31.15,55.68 OPAMP2:RN1.4
S17B  (via drill 0.38)
  Top 0.203: v15.91,45.92 15.91,47.14 OPAMP2:RN3.1
  Bottom 0.203: v15.91,45.92 15.91,31.29 15.1,30.48 15.1,16.66 25.26,6.5 J9.3
S18
  Top 0.203: SV12.3 91.75,88.25 92,88 J12.5
S18A
  Top 0.203: OPAMP3:RN1.4 55.13,55.68 49.64,55.68 43.75,61.57 43.75,67.46 43.14,68.07 43.14,71.73 42.33,72.54 33.79,72.54 28.51,67.26 24.04,67.26 22.82,68.48 J8.5
S18B  (via drill 0.38)
  Top 0.203: v38.67,47.95 39.28,47.35 39.89,47.35 OPAMP3:RN3.1
  Bottom 0.203: v38.67,47.95 28.1,47.95 27.9,48.16 17.13,48.16 14.69,45.72 14.69,14.63 22.82,6.5 J9.5
S19
  Top 0.203: SV12.4 89.71,85.5 95.19,85.5 J12.7
S19A  (via drill 0.38)
  Top 0.203: v60.21,56.49 60.21,46.53 59.6,45.92 59.4,45.92 55.74,42.27 55.74,42.06 55.33,41.66 OPAMP4:RN1.4
  Bottom 0.203: v60.21,56.49 60.82,56.49 72.4,68.07 72.4,71.73 71.59,72.54 33.79,72.54 28.51,67.26 26.68,67.26 J8.7
S19B
  Top 0.203: OPAMP4:RN3.1 39.89,33.12 39.89,26.01 20.38,6.5 J9.7
S20
  Top 0.203: SV12.5 91.83,83.17 92.08,82.92 J12.9
S20A
  Top 0.203: OPAMP5:RN1.4 78.09,55.47 78.9,54.66 88.91,54.66 95.21,60.96 95.21,64.97 93.94,66.24 93.94,71.73 92.72,72.95 32.17,72.95 27.9,68.68 J8.9
S20B  (via drill 0.38)
  Top 0.203: v58.38,40.64 58.38,42.27 62.65,46.53 62.65,47.08 OPAMP5:RN3.1 62.65,47.14 | v39.08,29.87 39.08,27.84 17.74,6.5 J9.9
  Bottom 0.203: v39.08,29.87 42.73,29.87 44.56,31.7 44.56,32.92 45.38,33.73 45.88,33.73 46.6,33.02 48.22,33.02 49.49,34.29 49.49,39.37 52.03,41.91 53.3,41.91 54.57,40.64 v58.38,40.64
VCC
  pour Bottom: 0,78 0,99 48,99 48.26,78
VCC1
  pour Bottom: 52,78 52,99 100,99 100.26,78
VREF  (via drill 0.38)
  Top 0.203: U$1.1 U$1.2 76.78,36.19 77.43,36.83 77.43,41.91 74.89,44.45 | v67.27,44.45 74.89,44.45 | 74.89,44.45 74.89,45.72 73.62,46.99 73.62,50.8 72.35,52.07 | OPAMP5:U$1.3 74.86,52.07 72.35,52.07 | OPAMP5:U$1.5 69.83,52.07 72.35,52.07 | OPAMP3:U$1.3 52.03,52.04 52.03,52.07 49.49,52.07 | 49.49,52.07 46.95,52.07 46.34,52.68 OPAMP3:U$1.5 | OPAMP2:U$1.3 27.27,51.42 | 27.27,51.42 26.63,52.07 22.82,52.07 22.21,52.68 OPAMP2:U$1.5 | OPAMP4:U$1.3 52,38.1 49.49,38.1 | OPAMP4:U$1.5 46.34,38.71 46.95,38.1 49.49,38.1 | 27.27,51.42 27.25,51.42 26.63,50.8 v26.63,44.45 26.63,38.83 27.29,38.17 27.8,38.17 OPAMP1:U$1.3 | 49.49,52.07 50.76,50.8 v50.76,44.45 49.49,43.18 49.49,38.1 | OPAMP1:U$1.5 21.55,39.39 v21.55,41.91
  Bottom 0.203: v21.55,41.91 24.09,44.45 v26.63,44.45 v50.76,44.45 v67.27,44.45

## Text on the board
tPlace: 5 | 6 | 5 | 6 | 1 | 1 | + | - | 10 | + | - | 10 | - | - | DI | + | CI | - | + | + | + | ^ | -
bPlace: Designed By: David Austin, Matthew Duncan, Michael Dugas | Designed By: David Austin, Matthew Duncan, Michael Dugas | Designed by: David Austin, Matthew Duncan, Michael Dugas